# Altium PCB control_servo_pcb.PcbDoc
Units mil, origin at the board's own origin, x right, y up, seen from the top; angles counter-clockwise.
Board outline 1968.5 x 1456.69 mil, 2 copper layers (Top Layer, Bottom Layer); 68 components, 53 nets, 234 pads, 0 vias.
Unrouted connection lines stored in the file: 151.
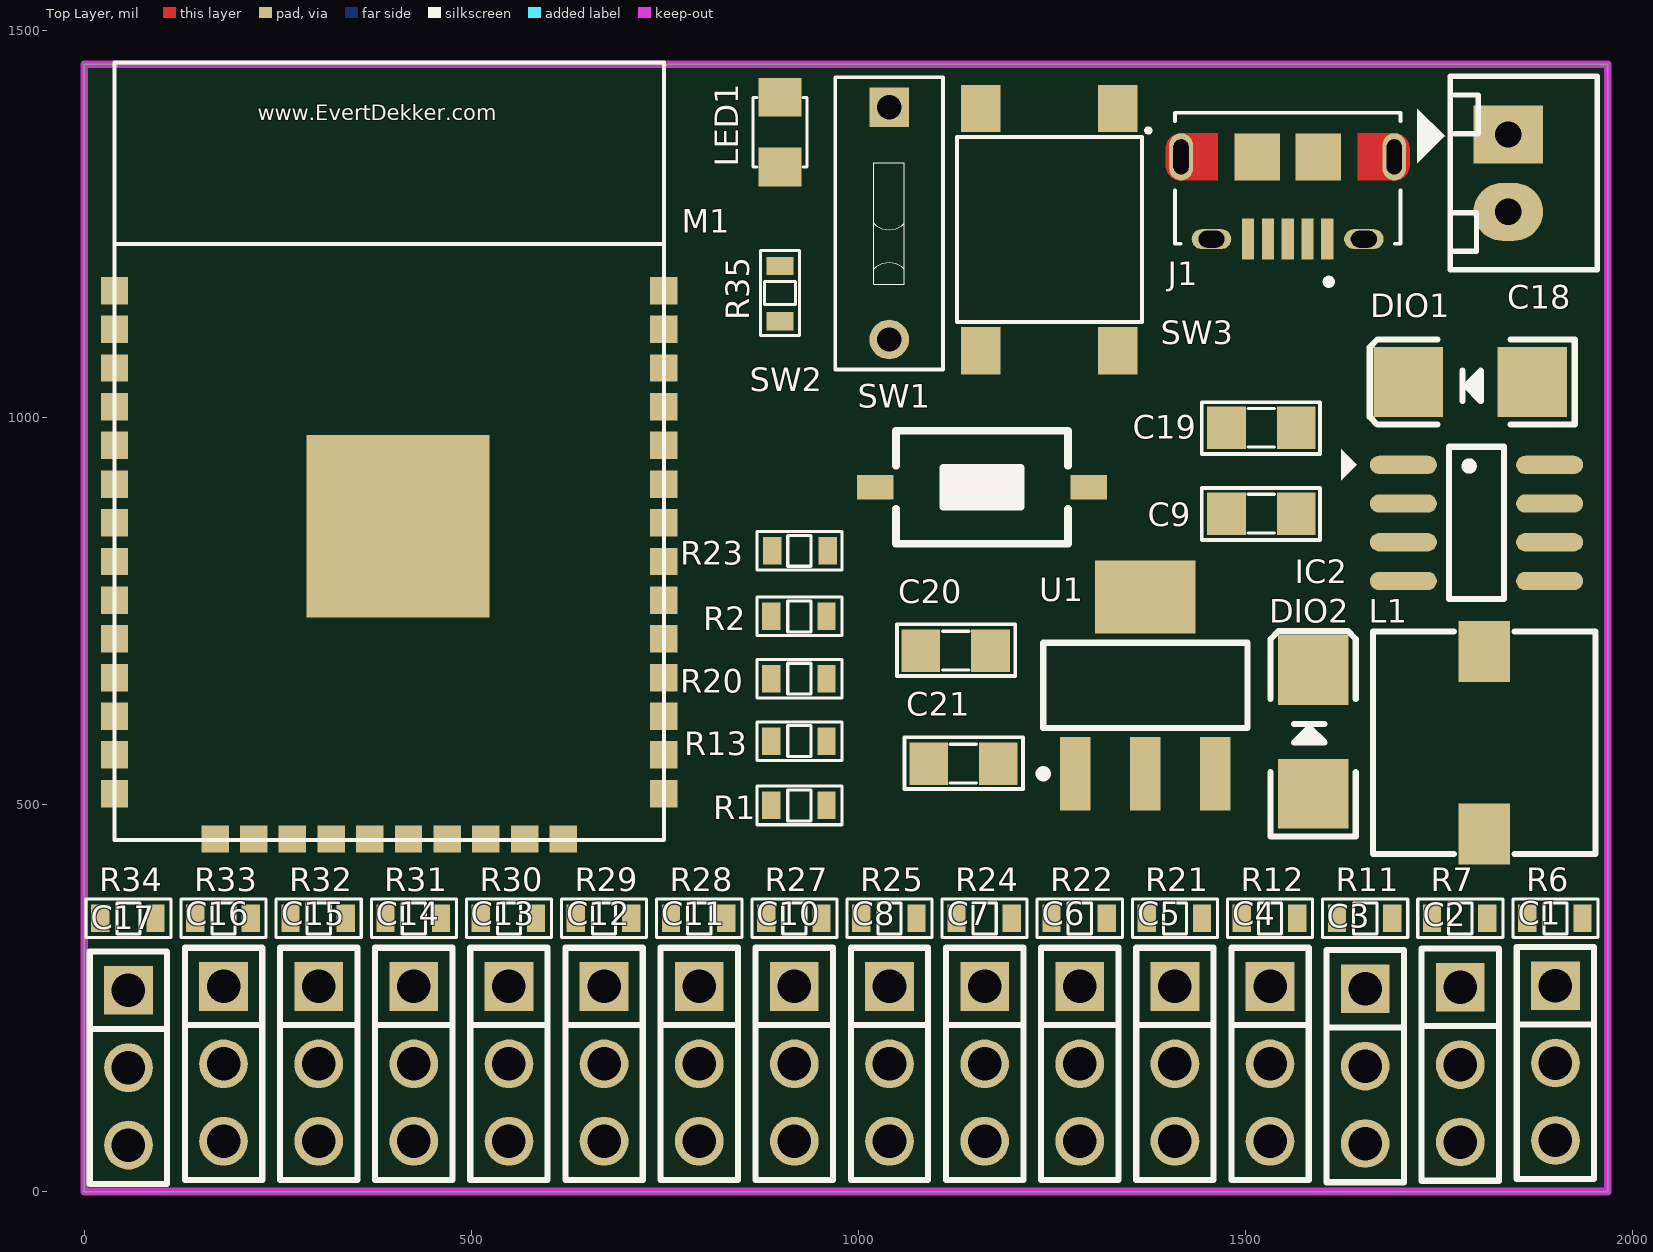
[diagram p0: Top Layer view]
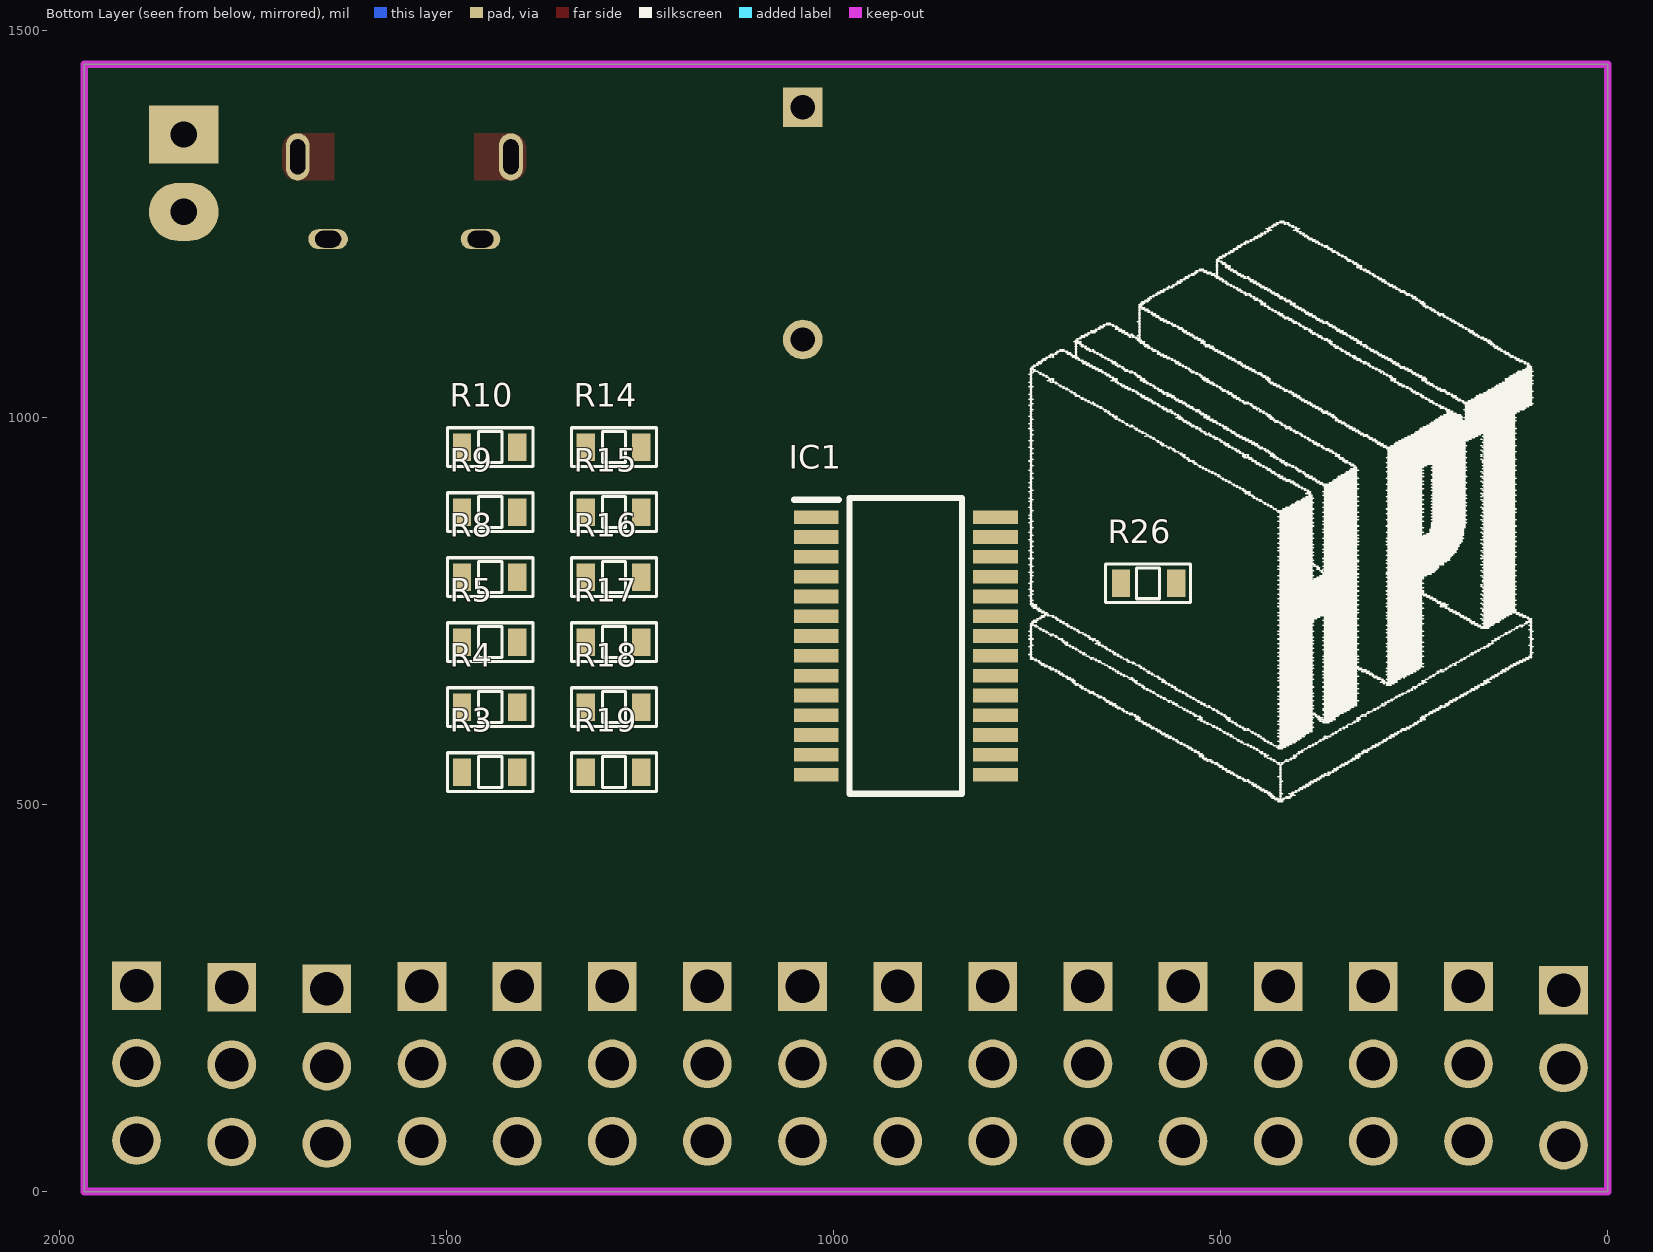
[diagram p1: Bottom Layer view, seen from below]

## Layer stack, top to bottom
Top Solder: solder mask 0.4, Solder Resist, Dk 3.5
Top Layer: signal copper 1.4
Dielectric 1: dielectric 12.6, FR-4, Dk 4.8
Bottom Layer: signal copper 1.4
Bottom Solder: solder mask 0.4, Solder Resist, Dk 3.5

## Board outline
0,0 0,1456.69 1968.5,1456.69 1968.5,0

## Design rules (kind name [scope] priority, off if disabled: settings)
Clearance [All] p1: gap=10
PolygonConnect [All] p1: connectstyle=Relief reliefconductorwidth=10 reliefentries=4 polygonreliefangle="90 Angle" airgapwidth=10
RoomDefinition control_servo_schematic [InComponentClass('control_servo_schematic')] p1: confinementstyle=ConfineIn formatcopy=TRUE lockcomponents=FALSE outline 2705,30 18090,30 18090,1175 2705,1175
RoutingVias [All] p1: holewidth=28 width=50 viastyle="Through Hole" minholewidth=28 minwidth=50 maxholewidth=28 maxwidth=50
SolderMaskExpansion [All] p1: expansion=4
Width [All] p1: maxlimit=10 minlimit=10 preferedwidth=10
30 further rules are at their usual default settings.

## Components (designator, comment, footprint, x,y, rotation, side; value= is the part's Value field where it differs from the comment)
C1 "JP3" JP3-D1T 1901,266 r270 top
C2 "JP3" JP3-D1T 1778.07,264 r270 top
C3 "JP3" JP3-D1T 1655.13,262 r270 top
C4 "JP3" JP3-D1T 1532.2,265 r270 top
C5 "JP3" JP3-D1T 1409.27,265 r270 top
C6 "JP3" JP3-D1T 1286.33,265 r270 top
C7 "JP3" JP3-D1T 1163.4,265 r270 top
C8 "JP3" JP3-D1T 1040.47,265 r270 top
C9 "104" SM-CAP-0805 1476,876 r0 top
C10 "JP3" JP3-D1T 917.53,265 r270 top
C11 "JP3" JP3-D1T 794.6,265 r270 top
C12 "JP3" JP3-D1T 671.67,265 r270 top
C13 "JP3" JP3-D1T 548.73,265 r270 top
C14 "JP3" JP3-D1T 425.8,265 r270 top
C15 "JP3" JP3-D1T 302.87,265 r270 top
C16 "JP3" JP3-D1T 179.93,265 r270 top
C17 "JP3" JP3-D1T 57,260 r270 top
C18 "Header2" Header2 1840,1366 r270 top
C19 "104" SM-CAP-0805 1476,987 r0 top
C20 "104" SM-CAP-0805 1171,699 r180 top
C21 "104" SM-CAP-0805 1181,553 r180 top
DIO1 "Diode SMD" DIO-SMD-106 1791,1046 r0 top
DIO2 "Diode SMD" DIO-SMD-106 1588,594 r270 top
IC1 "PCA9685PW,112" SOP65P640X110-28N 907,705 r180 bottom
IC2 "xl1509-5V" SO-8 1799,864 r0 top
J1 "10118194-0001LF" AMPHENOL_10118194-0001LF 1555,1337 r180 top
L1 "1.0 μH" L-SMD-M-7.3x4.5 1809,580 r0 top
LED1 "LED" LED-0805-Blue 899,1414 r270 top
M1 "ESP32S_Module" ESP32S 39,454.19 r0 top
R1 "10K" RES-SMD-0603 923.99,499 r180 top
R2 "10K" RES-SMD-0603 923.99,743.33 r180 top
R3 "220" RES-SMD-0603 1444,542 r0 bottom
R4 "220" RES-SMD-0603 1444,626 r0 bottom
R5 "220" RES-SMD-0603 1444,710 r0 bottom
R6 "220" RES-SMD-0603 1901,353 r180 top
R7 "220" RES-SMD-0603 1778.06,353 r180 top
R8 "220" RES-SMD-0603 1444,794 r0 bottom
R9 "220" RES-SMD-0603 1444,878 r0 bottom
R10 "220" RES-SMD-0603 1444,962 r0 bottom
R11 "220" RES-SMD-0603 1655.13,353 r180 top
R12 "220" RES-SMD-0603 1532.2,353 r180 top
R13 "4K7" RES-SMD-0603 923.99,582 r180 top
R14 "220" RES-SMD-0603 1284,962 r0 bottom
R15 "220" RES-SMD-0603 1284,878 r0 bottom
R16 "220" RES-SMD-0603 1284,794 r0 bottom
R17 "220" RES-SMD-0603 1284,710 r0 bottom
R18 "220" RES-SMD-0603 1284,626 r0 bottom
R19 "220" RES-SMD-0603 1284,542 r0 bottom
R20 "4K7" RES-SMD-0603 923.99,662.67 r180 top
R21 "220" RES-SMD-0603 1409.26,353 r180 top
R22 "220" RES-SMD-0603 1286.33,353 r180 top
R23 "4K7" RES-SMD-0603 924,828 r0 top
R24 "220" RES-SMD-0603 1163.4,353 r180 top
R25 "220" RES-SMD-0603 1040.46,353 r180 top
R26 "10K" RES-SMD-0603 594,786 r180 bottom
R27 "220" RES-SMD-0603 917.53,353 r180 top
R28 "220" RES-SMD-0603 794.6,353 r180 top
R29 "220" RES-SMD-0603 671.66,353 r180 top
R30 "220" RES-SMD-0603 548.73,353 r180 top
R31 "220" RES-SMD-0603 425.8,353 r180 top
R32 "220" RES-SMD-0603 302.86,353 r180 top
R33 "220" RES-SMD-0603 179.93,353 r180 top
R34 "220" RES-SMD-0603 57,353 r180 top
R35 "1K" RES-SMD-0603 899,1161 r270 top
SW1 "Reset" SW1-SMD 1160,910 r180 top
SW2 "Flash" SW-DIP1-1 1040,1251 r180 top
SW3 "SW" SW2-SMD 1247,1243.13 r270 top
U1 "LM1117-3.3V" SOT223 1371,654 r0 top

## Footprints (in the part's own frame and the unit in brackets; to place one, negate y for a bottom-side part, rotate by r counter-clockwise, add the part's x,y. Pads: shape width x height; smd on the part's side, far side on the other; paste and mask are expansions set on the pad)
AMPHENOL_10118194-0001LF [mm]
  rect 0.4x1.35 smd: 1(-1.3,2.7) 2(-0.65,2.7) 3(0,2.7) 4(0.65,2.7) 5(1.3,2.7)
  oval 1.3x0.65 hole 0.55 slot 0.85 at 0 deg: S1(-2.5,2.7) S2(2.5,2.7)
  oval 0.775x1.55 hole 0.5 slot 1.15 at 90 deg: S3(-3.5,0) S6(3.5,0)
  rect 1.5x1.55 smd: S4(-1,0) S5(1,0)
  Top Layer region: 193 vertices and 0 holes, not listed, extent 2.3,-0.78 4,0.775
  Top Layer region: 193 vertices and 0 holes, not listed, extent -4,-0.775 -2.3,0.78
  silkscreen extent -3.7,-1.45 3.7,4.2, body extent -3.99,-2.67 4.06,2.91, height 3.12
DIO-SMD-106 [mil]
  rect 90x90.55 smd: 1(80,0) 2(-80,0)
  silkscreen extent -130,-55 135,55, body extent -99,-50 106,52, height 95
ESP32S [mm] "ESP32S-Module"
  rect 0.9x0.9 smd: 1(0,18.034) 2(0,16.764) 3(0,15.494) 4(0,14.224) 5(0,12.954) 6(0,11.684) 7(0,10.414) 8(0,9.144) 9(0,7.874) 10(0,6.604) 11(0,5.334) 12(0,4.064) 13(0,2.794) 14(0,1.524) 15(3.3,0.034) 16(4.57,0.034) 17(5.84,0.034) 18(7.11,0.034) 19(8.38,0.034) 20(9.65,0.034) 21(10.92,0.034) 22(12.19,0.034) 23(13.46,0.034) 24(14.73,0.034) 25(18.034,1.524) 26(18.034,2.794) 27(18.034,4.064) 28(18.034,5.334) 29(18.034,6.604) 30(18.034,7.874) 31(18.034,9.144) 32(18.034,10.414) 33(18.034,11.684) 34(18.034,12.954) 35(18.034,14.224) 36(18.034,15.494) 37(18.034,16.764) 38(18.034,18.034)
  rect 6x6 smd: 101(9.3,10.3)
  silkscreen extent 0,0 18.03,25.53, body extent 0,0 18.03,25.53, height 2
Header2 [mil] "CON2"
  rect 75x90 hole 34: 1(0,0)
  oval 75x90 hole 34: 2(100,0)
  silkscreen extent -75,-118 175,115, body extent -68,-70 168,107, height 236
JP3-D1T [mm] "3 pins, 1 row, straight, gold plating"
  rect 1.6x1.6 hole 1.1: 1(0,0)
  round 1.6 hole 1.1: 2(2.54,0) 3(5.08,0)
  silkscreen extent -1.27,-1.27 6.35,1.27, body extent -1.27,-1.27 6.35,1.27, height 8.54
L-SMD-M-7.3x4.5 [mm] "WE-PDA SMD Shielded Power Inductor, 7345"
  rect 1.7x2 smd: 1(0,3) 2(0,-3)
  silkscreen extent -3.65,-3.65 3.65,3.65, body extent -3.65,-3.65 3.65,3.65, height 4.05
LED-0805-Blue [mil]
  rect 50x55 smd: 1(0,0) 2(90,0)
  silkscreen extent 0,-35 90,35, body extent 5,-25 85,25, height 43
RES-SMD-0603 [mm]
  rect 0.6x0.9 smd: 1(-0.889,0) 2(0.927,0)
  silkscreen extent -1.4,-0.64 1.4,0.64, body extent -0.8,-0.4 0.8,0.4, height 0.43
SM-CAP-0805 [mil]
  rect 50x55 smd: 1(0,0) 2(90,0)
  silkscreen extent -32,-34 121,33, body extent 6,-25 84,25, height 31
SO-8 [mm] "8-Pin Small Outline Integrated Circuit 1.27 mm Pitch, IPC Medium Density"
  oval 2.2x0.6 smd: 1(-2.4,1.905) 2(-2.4,0.635) 3(-2.4,-0.635) 4(-2.4,-1.905) 5(2.4,-1.905) 6(2.4,-0.635) 7(2.4,0.635) 8(2.4,1.905)
  silkscreen extent -4.44,-2.5 0.9,2.5, body extent -2.93,-2.51 3.08,2.49, height 1.75
SOP65P640X110-28N [mm]
  rect 1.475x0.45 smd: 1(-2.938,4.225) 2(-2.938,3.575) 3(-2.938,2.925) 4(-2.938,2.275) 5(-2.938,1.625) 6(-2.938,0.975) 7(-2.938,0.325) 8(-2.938,-0.325) 9(-2.938,-0.975) 10(-2.938,-1.625) 11(-2.938,-2.275) 12(-2.938,-2.925) 13(-2.938,-3.575) 14(-2.938,-4.225) 15(2.938,-4.225) 16(2.938,-3.575) 17(2.938,-2.925) 18(2.938,-2.275) 19(2.938,-1.625) 20(2.938,-0.975) 21(2.938,-0.325) 22(2.938,0.325) 23(2.938,0.975) 24(2.938,1.625) 25(2.938,2.275) 26(2.938,2.925) 27(2.938,3.575) 28(2.938,4.225)
  silkscreen extent -3.67,-4.85 1.85,4.85, body extent -3.2,-4.85 3.2,4.85, height 1.1
SOT223 [mm]
  rect 1x2.4 smd: 1(-2.3,-2.9) 2(0,-2.9) 3(2.3,-2.9)
  rect 3.3x2.4 smd: 4(0,2.9)
  silkscreen extent -3.47,-3.02 3.35,1.4, body extent -3.25,-3.56 3.25,3.4, height 1.68
SW1-SMD [mm]
  rect 1.2x0.8 smd: 1(-3.5,0) 2(3.5,0)
  silkscreen extent -2.82,-1.85 2.82,1.85, body extent -3.05,-1.85 3.05,1.85, height 2.5
SW2-SMD [mm] "6*6mm vertical type, SMD, height 5.0mm, black actuator, 160gf, T&R"
  rect 1.55x1.3 smd: 1(-3.975,2.25) 2(-3.975,-2.25) 3(3.975,-2.25) 4(3.975,2.25)
  silkscreen extent -3.29,-3.04 3.04,3.29, body extent -4.5,-3.1 4.5,3.1, height 4.99
SW-DIP1-1 [mm] "01p, 2.54mm Pitch, Horizontal, Box Type, THT, flat Actuator, red, without Tape, Tube"
  rect 1.3x1.3 hole 0.8: 1(0,-3.81)
  round 1.3 hole 0.8: 2(0,3.81)
  silkscreen extent -1.77,-4.8 1.77,4.8, body extent -1.77,-4.8 1.77,4.8, height 5.4

## Part data
C1 C2 C3 C4 C5 C6 C7 C8 C10 C11 C12 C13 C14 C15 C16 C17: "WR-PHD 2.54 mm Angled Socket Header"
C9 C19 C20 C21: library part CN
C18: "Header IDC, 2 x 1 Pin Vertical 2.54mm Pitch (Non-Boxed, Male)"
DIO1 DIO2: "Default Diode"
IC1: "Integrated Circuit"
IC2: library part LS1240A, "Electronic Two-Tone Ringer"
J1: "USB - micro B USB 2.0 Receptacle Connector 5 Position Surface Mount, Right Angle; Through Hole"
L1: library part L-SMD-1
LED1: library part "LED SMD"
M1: "Esp-32S"
R1 R2 R3 R4 R5 R6 R7 R8 R9 R10 R11 R12 R13 R14 R15 R16 R17 R18 R19 R20 R21 R22 R23 R24 R25 R26 R27 R28 R29 R30 R31 R32 R33 R34 R35: library part Res-SMD, "Resistor"
SW1 SW2: library part SW2, "Switch button 2 pin"
SW3: library part SW4, "Switch button 4 pin"
U1: library part LM1117, "800mA Low-Dropout Linear Regulator"

## Nets (pads, with @x,y where several pads share a name; then routed paths per layer and width w, separated by ;. In a path a pad name is that pad's centre, name@x,y a point inside that pad or via, vN(x,y) a via of type N, cw(c..) or ccw(c..) an arc to the next point about the centre after c; other vN are vias at no path point)
3V3: C21.2 LED1.1 M1.2 R1.1 R2.2 R13.1 R20.1 R23.2 U1.2
5V: C1.2 C2.2 C3.2 C4.2 C5.2 C6.2 C7.2 C8.2 C9.2 C10.2 C11.2 C12.2 C13.2 C14.2 C15.2 C16.2 C17.2 C20.2 IC1.28 IC2.3 J1.1 L1.1 R3.1 R4.1 R5.1 R8.1 R9.1 R10.1 U1.3
12V: C18.2 C19.2 DIO1.2 IC2.1
A0: IC1.1 R10.2 R14.1
A1: IC1.2 R9.2 R15.1
A2: IC1.3 R8.2 R16.1
A3: IC1.4 R5.2 R17.1
A4: IC1.5 R4.2 R18.1
A5: IC1.24 R3.2 R19.1
BTN_M9: M1.25 R1.2 SW2.2
BUTTON: M1.27
GND: C1.3 C2.3 C3.3 C4.3 C5.3 C6.3 C7.3 C8.3 C9.1 C10.3 C11.3 C12.3 C13.3 C14.3 C15.3 C16.3 C17.3 C18.1 C19.1 C20.1 C21.1 DIO1.1 DIO2.1 IC1.14 IC1.25 IC2.5 IC2.6 IC2.7 IC2.8 J1.5 J1.S1 J1.S2 J1.S3 J1.S4 J1.S5 J1.S6 M1.1 M1.15 M1.38 M1.101 R14.2 R15.2 R16.2 R17.2 R18.2 R19.2 R26.1 R35.2 SW1.2 SW2.1 SW3.1 SW3.4 U1.1
NetC1_1: C1.1 R6.1
NetC2_1: C2.1 R7.1
NetC3_1: C3.1 R11.1
NetC4_1: C4.1 R12.1
NetC5_1: C5.1 R21.1
NetC6_1: C6.1 R22.1
NetC7_1: C7.1 R24.1
NetC8_1: C8.1 R25.1
NetC10_1: C10.1 R27.1
NetC11_1: C11.1 R28.1
NetC12_1: C12.1 R29.1
NetC13_1: C13.1 R30.1
NetC14_1: C14.1 R31.1
NetC15_1: C15.1 R32.1
NetC16_1: C16.1 R33.1
NetC17_1: C17.1 R34.1
NetDIO2_2: DIO2.2 IC2.2 L1.2
NetIC1_23: IC1.23 R26.2
NetLED1_2: LED1.2 R35.1
NetM1_3: M1.3 R2.1 SW1.1
NetR23_1: R23.1 SW3.2 SW3.3
PWM1: IC1.6 R6.2
PWM2: IC1.7 R7.2
PWM3: IC1.8 R11.2
PWM4: IC1.9 R12.2
PWM5: IC1.10 R21.2
PWM6: IC1.11 R22.2
PWM7: IC1.12 R24.2
PWM8: IC1.13 R25.2
PWM9: IC1.15 R27.2
PWM10: IC1.16 R28.2
PWM11: IC1.17 R29.2
PWM12: IC1.18 R30.2
PWM13: IC1.19 R31.2
PWM14: IC1.20 R32.2
PWM15: IC1.21 R33.2
PWM16: IC1.22 R34.2
RX_1: J1.2 M1.35
SCL: IC1.26 M1.36 R20.2
SDA: IC1.27 M1.33 R13.2
TX_1: J1.3 M1.34
pads on no net: IC2.4 J1.4 M1.4 M1.5 M1.6 M1.7 M1.8 M1.9 M1.10 M1.11 M1.12 M1.13 M1.14 M1.16 M1.17 M1.18 M1.19 M1.20 M1.21 M1.22 M1.23 M1.24 M1.26 M1.28 M1.29 M1.30 M1.31 M1.32 M1.37 U1.4

## Keep-outs
Keep-Out Layer:
  the board outline again, w10

## Silkscreen, mask and mechanical layers (free items; w line width, h text height)
Bottom Overlay:
  drawing of 2330 lines, arcs and shapes, not listed

## Dimensions
0,1456.69 to 1968.5,1456.69 on Top Overlay
0,1456.69 to 0,0 on Top Overlay

## Text inside footprints (layer, text, board x,y; h text height)
J1: Mechanical 13 "PCB END" at 1631.77,1419.68 h19.68 r180
M1: Top Overlay "www.EvertDekker.com" at 224,1384.19 h19.68